# Altium PCB full_receive.PcbDoc
Units mil, origin at the board's own origin, x right, y up, seen from the top; angles counter-clockwise.
Board outline 20595 x 12245 mil, 2 copper layers (Top Layer, Bottom Layer); 110 components, 71 nets, 375 pads, 368 vias.
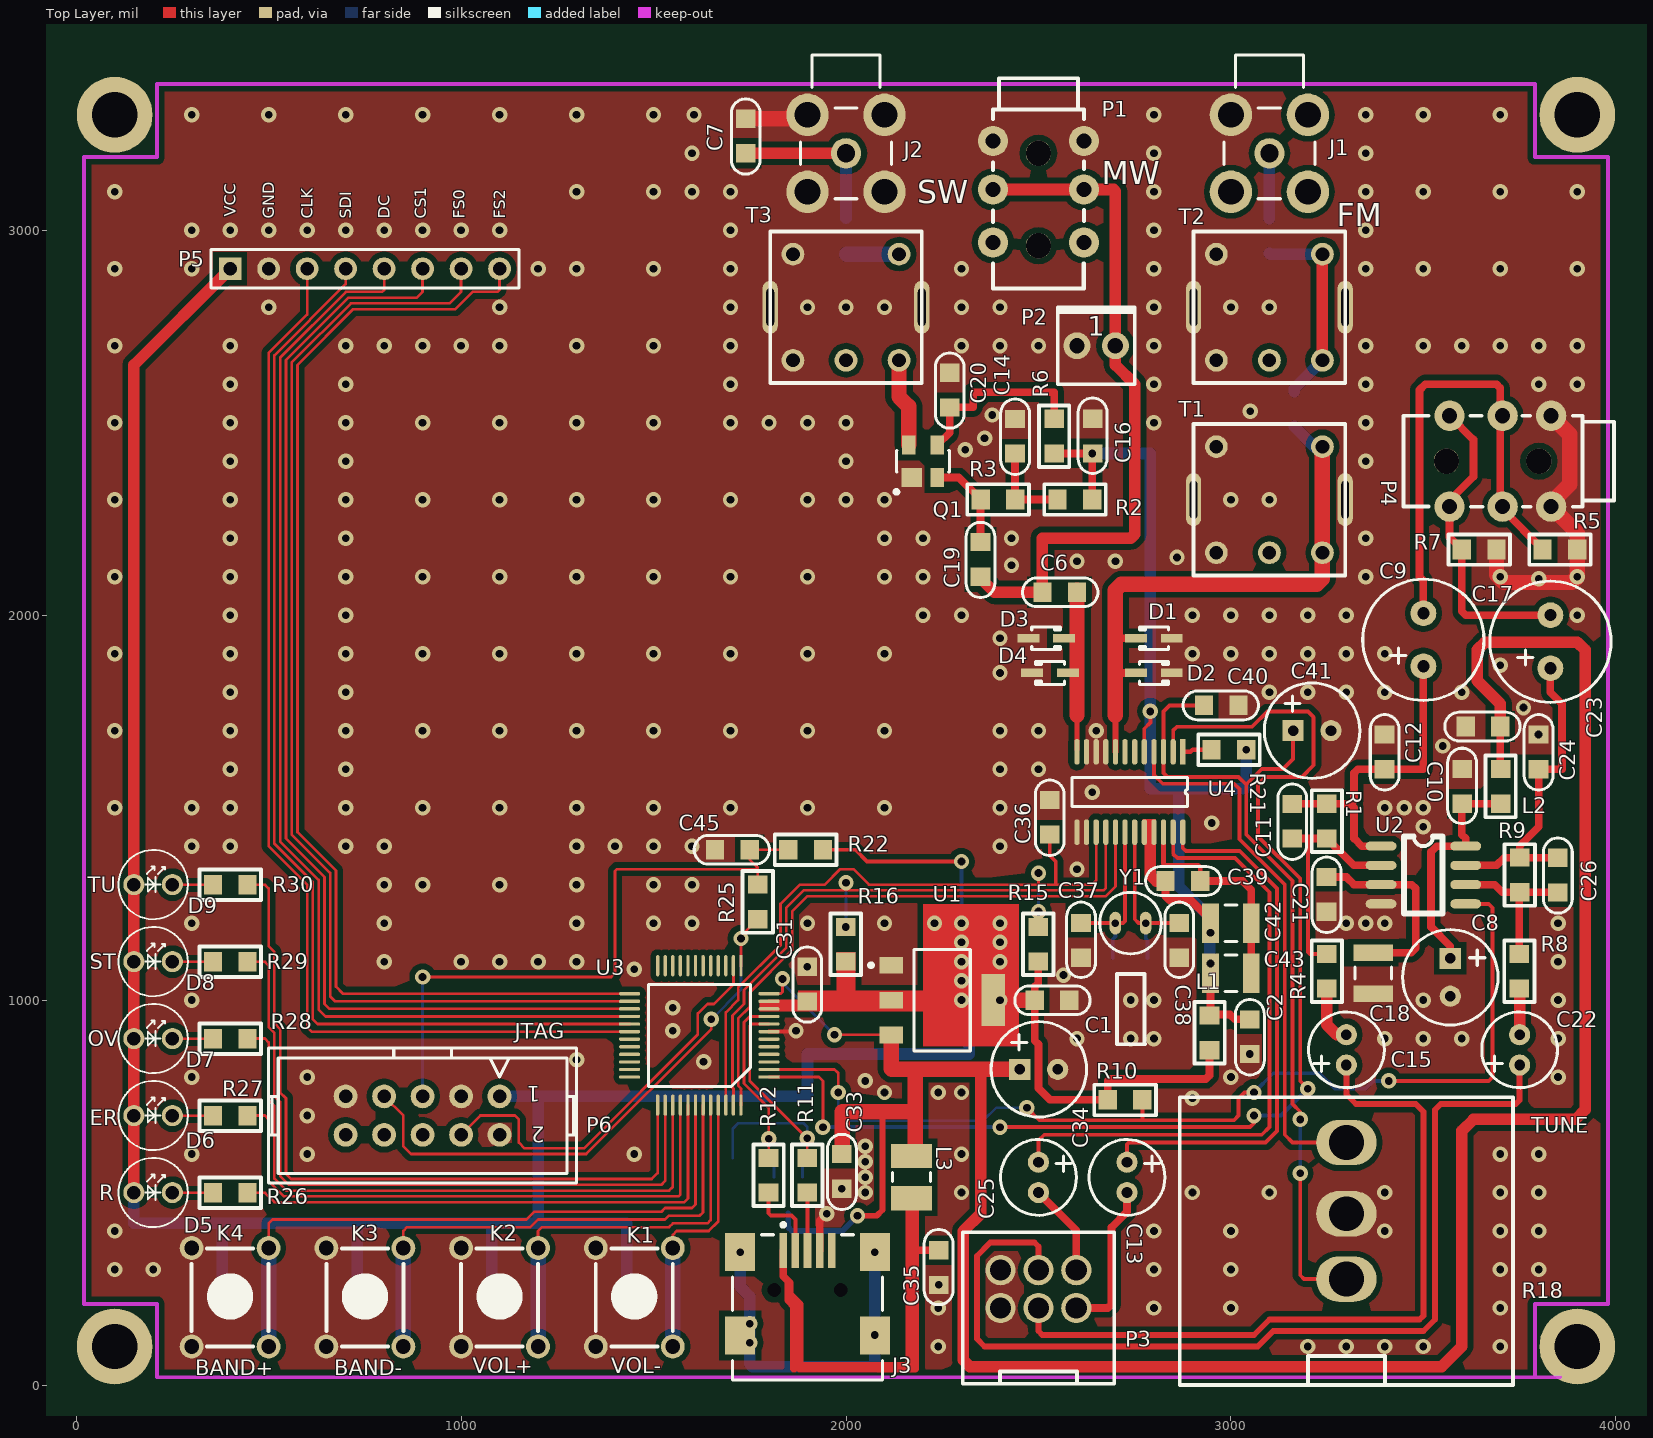
[diagram p0: Top Layer view]
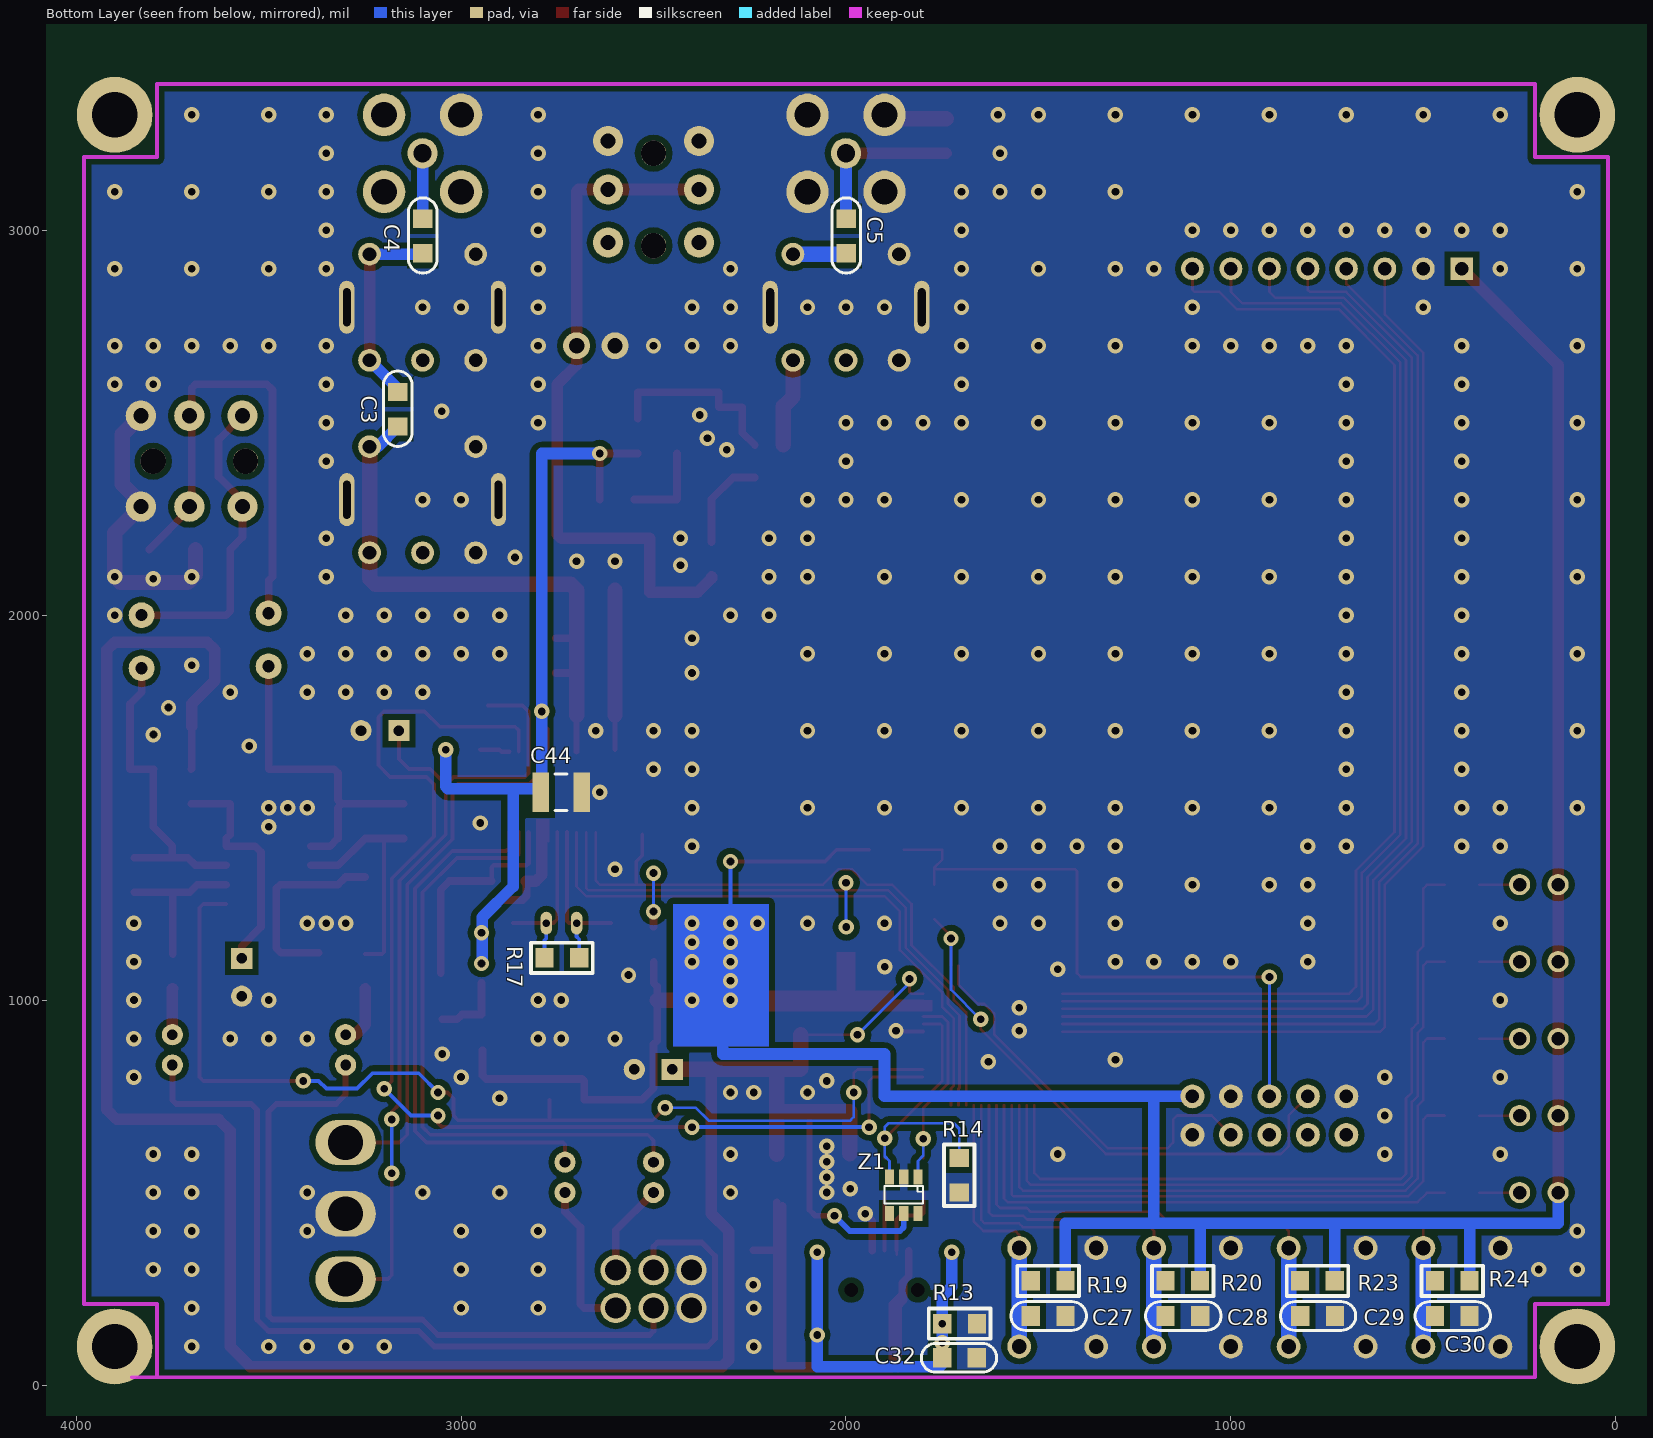
[diagram p1: Bottom Layer view, seen from below]

## Layer stack, top to bottom
Top Layer: signal copper 1.4
Dielectric: dielectric 12.6, FR-4, Dk 4.8
Bottom Layer: signal copper 1.4

## Board outline
-1470,8380 -1690,8160 -1690,-2660 18305,-2660 18800,-2165 18005,-1370 18005,9585 -585,9585 -1690,8480 -1795,8375 -1795,7905

## Design rules (kind name [scope] priority, off if disabled: settings)
Clearance Clearance_1 [(InPolygon)] p1: gap=15
Clearance [All] p2: gap=8
ComponentClearance [All] p1: gap=1 collisioncheckmode=2 verticalgap=10
Height [All] p1: minheight=0 maxheight=10000 prefheight=1000
HoleSize [All] p1: absolutevalues=TRUE maxlimit=1000 minlimit=1 maxpercent=80.000 minpercent=20.000
PlaneConnect [All] p1: planeconnectstyle=Direct reliefexpansion=20 reliefentries=4 reliefconductorwidth=10 reliefairgap=10
PolygonConnect [All] p1: connectstyle=Direct reliefconductorwidth=10 reliefentries=4 polygonreliefangle="90 Angle"
RoutingVias [All] p1: holewidth=28 width=50 viastyle="Through Hole" minholewidth=20 minwidth=40 maxholewidth=28 maxwidth=50
SolderMaskExpansion [All] p1: expansion=4
TestPointUsage [All] p1: valid=0 allowmultiple=FALSE
Testpoint [All] p1: side=15 testpointundercomponent=TRUE minsize=40 maxsize=100 preferedsize=60 minholesize=0 maxholesize=40 preferedholesize=32 testpointgrid=1 style=1023 order=0-112345678
Width [All] p1: maxlimit=100 minlimit=7 preferedwidth=10 minimp=50.000000 maximp=50.000000 favimp=50.000000
15 further rules are at their usual default settings.

## Components (designator, comment, footprint, x,y, rotation, side; value= is the part's Value field where it differs from the comment)
C1 "2.2uF" 0805C 2580,1000 r90 top
C2 "2.2uF" 0805C 3050,860 r0 top
C3 "33pF" 0805C 3165,2580 r0 bottom
C4 "33pF" 0805C 3100,3030 r0 bottom
C5 "33pF" 0805C 2000,3030 r0 bottom
C6 "0.47uF" 0805C 2600,2060 r90 top
C7 "33pF" 0805C 1740,3200 r0 top
C8 "10uF_25V" RB2.5-6.3 3570,1010 r90 top
C9 "2.2uF" 0805C 3610,1710 r270 top
C10 "0.33uF" 0805C 3600,1600 r180 top
C11 "2.2uF" 0805C 3160,1419.86 r0 top
C12 "100pF" 0805C 3400,1600 r0 top
C13 "10uF_25V" RB2-5 2730,500 r90 top
C14 "33pF" 0805C 2440,2420 r0 top
C15 "10uF_25V" RB2-5 3300,910 r270 top
C16 "0.47uF" 0805C 2640,2510 r180 top
C17 "1000uF_25V" RB3.5-8 3500,2005 r270 top
C18 "0.1uF" CAPC3225L 3370,1070 r90 top
C19 "0.47uF" 0805C 2350,2100 r0 top
C20 "0.47uF" 0805C 2270,2540 r0 top
C21 "0.1uF" 0805C 3249.27,1229.86 r0 top
C22 "10uF_25V" RB2-5 3750,910 r270 top
C23 "1000uF_25V" RB3.5-8 3830,2000 r270 top
C24 "100pF" 0805C 3800,1600 r0 top
C25 "10uF_25V" RB2-5 2500,500 r90 top
C26 "2.2uF" 0805C 3850,1280 r0 top
C27 "0.33uF" 0805C 1430,180 r90 bottom
C28 "0.33uF" 0805C 1080,180 r90 bottom
C29 "0.33uF" 0805C 730,180 r90 bottom
C30 "0.33uF" 0805C 380,180 r90 bottom
C31 "0.33uF" 0805C 1900,996.85 r0 top
C32 "0.1uF" 0805C 1750,70 r270 bottom
C33 "0.33uF" 0805C 1990,510 r0 top
C34 "10uF_25V" RB2.5-6.3 2550,820 r180 top
C35 "0.1uF" 0805C 2240,350 r180 top
C36 "0.1uF" 0805C 2530,1430 r0 top
C37 "20pF" 0805C 2610,1200 r180 top
C38 "20pF" 0805C 2865,1200 r180 top
C39 "0.1uF" 0805C 2920,1310 r90 top
C40 "0.1uF" 0805C 2930,1765 r270 top
C41 "10uF_25V" RB2.5-6.3 3260,1700 r180 top
C42 "2.2uF" CAPC3225L 3000,1200 r180 top
C43 "2.2uF" CAPC3225L 3000,1070 r180 top
C44 "2.2uF" CAPC3225L 2740,1540 r0 bottom
C45 "0.33uF" 0805C 1660,1390 r270 top
D1 "D1213A" SOD-323 2800,1940 r180 top
D2 "D1213A" SOD-323 2800,1850 r0 top
D3 "D1213A" SOD-323 2520,1940 r0 top
D4 "D1213A" SOD-323 2530,1850 r180 top
D5 "LED0" LEDLight 200,500 r0 top
D6 "LED0" LEDLight 200,700 r0 top
D7 "LED0" LEDLight 200,900 r0 top
D8 "LED0" LEDLight 200,1100 r0 top
D9 "LED0" LEDLight 200,1300 r0 top
J1 "COAX-F" MCX5.08-H5 3100,3200 r270 top
J2 "COAX-F" MCX5.08-H5 2000,3200 r270 top
J3 "440479-1" 440479 1900,40 r270 top
K1 "KEY_M" KEY_M 1350,100 r90 top
K2 "KEY_M" KEY_M 1000,100 r90 top
K3 "KEY_M" KEY_M 650,100 r90 top
K4 "KEY_M" KEY_M 300,100 r90 top
L1 "120nH" 0805R 2945,870 r0 top
L2 "120nH" 0805R 3700,1600 r180 top
L3 "120nH" 3225[1210] 2170,540 r90 top
P1 "PHONE_M" PHONE_ST 2500,3100 r90 top
P2 "Header 2" 2510-2 2600,2700 r0 top
P3 "Header 6" RK097 2500,200 r0 top
P4 "PHONE_M" PHONE_ST 3700,2400 r0 top
P5 "Header 8" HDR1X8 400,2900 r0 top
P6 "Header 5X2" FKV10SN 900,700 r180 top
Q1 "BF998" SOT143 2200,2400 r0 top
R1 "100K" 0805R 3250,1420 r0 top
R2 "10R" 0805R 2550,2300 r270 top
R3 "1K" 0805R 2350,2300 r270 top
R4 "12L" 0805R 3250,1030 r0 top
R5 "100K" 0805R 3810,2170 r270 top
R6 "12L" 0805R 2540,2510 r180 top
R7 "100K" 0805R 3600,2170 r270 top
R8 "12K" 0805R 3750,1030 r0 top
R9 "100K" 0805R 3750,1370 r180 top
R10 "10K" 0805R 2680,740 r270 top
R11 "2.2R" 0805R 1900,500 r0 top
R12 "2.2R" 0805R 1799.27,499.86 r0 top
R13 "1M" 0805R 1660,160 r90 bottom
R14 "1.5K" 0805R 1705,500 r180 bottom
R15 "20K" 0805R 2500,1100 r0 top
R16 "20K" 0805R 2000,1100 r0 top
R17 "4.6M" 0805R 2783,1109 r270 bottom
R18 "100K" 3590S 3300,275 r90 top
R19 "10K" 0805R 1520,270 r270 bottom
R20 "10K" 0805R 1170,270 r270 bottom
R21 "12K" 0805R 2950,1650 r270 top
R22 "1K" 0805R 1850,1390 r270 top
R23 "10K" 0805R 820,270 r270 bottom
R24 "10K" 0805R 470,270 r270 bottom
R25 "1K" 0805R 1770,1300 r180 top
R26 "1K" 0805R 445,500 r90 top
R27 "1K" 0805R 445,700 r90 top
R28 "1K" 0805R 445,900 r90 top
R29 "1K" 0805R 445,1100 r90 top
R30 "1K" 0805R 445,1300 r90 top
T1 "IF-001" IF_10X10 3100,2300 r270 top
T2 "IF-001" IF_10X10 3100,2800 r270 top
T3 "IF-001" IF_10X10 2000,2800 r270 top
U1 "REG1117-3.3" ZZ311 2250,1000 r270 top
U2 "LM4881M/NOPB" SO-8 3390,1400 r0 top
U3 "C8051F340/1/4/5" TQFP-48 1800,800 r180 top
U4 "Si4844-B20-GU" SSOP24-0.635 2875,1645 r270 top
Y1 "32.768K" Crystal32 2740,1200 r0 top
Z1 "NUP4301MR6T1" TSOP-6 1850,540 r270 bottom

## Footprints (in the part's own frame and the unit in brackets; to place one, negate y for a bottom-side part, rotate by r counter-clockwise, add the part's x,y. Pads: shape width x height; smd on the part's side, far side on the other; paste and mask are expansions set on the pad)
0805C [mm]
  rect 1.3x1.2 smd: 1(-0.019,-0.004) 2(-0.019,2.282)
  silkscreen extent -0.97,-1.38 0.93,3.59
0805R [mm]
  rect 1.3x1.2 smd: 1(-0.019,-0.004) 2(-0.019,2.282)
  silkscreen extent -1.02,-0.89 0.99,3.17
2510-2 [mil]
  round 70 hole 40: 1(0,0) 2(100,0)
  silkscreen extent -51,-100 150,100
3225[1210] [mm] "Chip Resistor; Body 3.2 x 2.5 mm (LxW typ)"
  rect 1.6x2.7 smd: 1(-1.4,0) 2(1.4,0)
  silkscreen extent -0.3,-1.25 0.3,1.25
3590S [mm]
  oval 3x4 hole 2.3: 1(0,0) 2(4.318,0) 3(9.017,0)
  silkscreen extent -6.99,-11 12,11
440479 [mm] "Connector; USB2.0, Type AB, SM; 5 Position; Right Angle"
  rect 2.3x0.5 smd: 1(-7.85,-1.6) 2(-7.85,-0.8) 3(-7.85,0) 4(-7.85,0.8) 5(-7.85,1.6)
  rect 2.5x2 smd: 6(-7.75,4.45) 7(-2.25,4.45) 8(-7.75,-4.45) 9(-2.25,-4.45)
  round 0.6 hole 0.9 unplated: MH1(-5.25,2.2) MH2(-5.25,-2.2)
  silkscreen extent -9.67,-4.95 0.7,4.95
CAPC3225L [mm] "Chip Capacitor, Body 3.2x2.5mm, IPC High Density"
  rect 1.1x2.6 smd: 1(-1.35,0) 2(1.35,0)
  silkscreen extent -0.4,-1.2 0.4,1.2, body extent -1.7,-1.35 1.7,1.35, height 1.35
Crystal32 [mm]
  oval 0.75x1.5 hole 0.5: 1(-1.02,0.001) 2(0.98,0.001)
  silkscreen extent -2.05,-8 2.01,2.03
FKV10SN [mil]
  round 62 hole 35: 1(-200,-50) 2(-200,50) 3(-100,-50) 4(-100,50) 5(0,-50) 6(0,50) 7(100,-50) 8(100,50) 9(200,-50) 10(200,50)
  silkscreen extent -400,-175 400,175
HDR1X8 [mm] "Connector; Header; 8 Position"
  rect 1.5x1.5 hole 0.9: 1(0,0)
  round 1.5 hole 0.9: 2(2.54,0) 3(5.08,0) 4(7.62,0) 5(10.16,0) 6(12.7,0) 7(15.24,0) 8(17.78,0)
  silkscreen extent -1.27,-1.27 19.05,1.27
IF_10X10 [mm]
  round 1.5 hole 0.9: 1(-3.5,3.5) 2(-3.5,-3.5) 3(3.5,-3.5) 4(3.5,0) 5(3.5,3.5)
  oval 3.5x1 hole 0.5 slot 2.5 at 0 deg: 6(0,5) 7(0,-5)
  silkscreen extent -5,-5 5,5
KEY_M [mil]
  round 62 hole 38: 1(0,0) 1(255.91,0) 2(0,-200) 2(255.91,-200)
  silkscreen extent 0,-200 255,0
LEDLight [mil]
  round 55 hole 35: 1(-50,0) 2(50,0)
  silkscreen extent -90,-90 90,90
MCX5.08-H5 [mm] "Connector; RF Coaxial, MCX, Thru-Hole; 5 Position; Right-Angle"
  round 2 hole 1.2: 1(0,0)
  round 2.8 hole 1.7: 2(-2.54,-2.54) 3(2.54,-2.54) 4(2.54,2.54) 5(-2.54,2.54)
  silkscreen extent -6.5,-3 3,3
PHONE_ST [mm]
  round 1.676 hole 1.676: 0(-3.556,0) 0(2.54,0)
  round 2 hole 1: 1(-3.35,-3) 1(-3.35,3) 2(0.15,3) 2(0.15,-3) 3(3.35,-3) 3(3.35,3)
  silkscreen extent -6.39,-3.01 7.49,3
RB2-5 [mil]
  round 55 hole 27.56: 1(78.74,0) 2(0,0)
  silkscreen extent -59,-98 138,98
RB2.5-6.3 [mil]
  rect 55x55 hole 27.56: 1(98.43,0)
  round 55 hole 27.56: 2(0,0)
  silkscreen extent -75,-124 173,124
RB3.5-8 [mm]
  round 1.7 hole 0.8: 1(3.5,0) 2(0,0)
  silkscreen extent -2.25,-4 5.75,4
RK097 [mm]
  round 2 hole 1.4: 1(-2.5,0) 2(0,0) 3(2.5,0) 4(2.5,2.5) 5(0,2.5) 6(-2.5,2.5)
  silkscreen extent -5,-5 5,5
SO-8 [mil]
  oval 80x24 smd: 1(0,0) 2(0,-50) 3(0,-100) 4(0,-150) 5(220,-150) 6(220,-100) 7(220,-50) 8(220,0)
  silkscreen extent 60,-175 160,25
SOD-323 [mm] "SOD-323/SC-76; 2 Leads; Body 1.7 x 1.3 mm, (LxW)"
  rect 1.45x0.55 smd: 1(1.175,0) 2(-1.175,0)
  silkscreen extent -0.95,-0.75 0.95,0.75
SOT143 [mm] "SOT-143; 4 Leads; Body 3 x 2.5 mm, inc. leads (LxW max)"
  rect 1.35x1.25 smd: 1(-0.75,-1.075)
  rect 0.9x1.25 smd: 2(0.95,-1.075) 3(0.95,1.075) 4(-0.95,1.075)
  silkscreen extent -1.87,-2.15 1.75,0.7
SSOP24-0.635 [mm]
  rect 1.7x0.35 smd: 1(0,0)
  oval 1.7x0.35 smd: 2(0,-0.635) 3(0,-1.27) 4(0,-1.905) 5(0,-2.54) 6(0,-3.175) 7(0,-3.81) 8(0,-4.445) 9(0,-5.08) 10(0,-5.715) 11(0,-6.35) 12(0,-6.985) 13(5.3,-6.985) 14(5.3,-6.35) 15(5.3,-5.715) 16(5.3,-5.08) 17(5.3,-4.445) 18(5.3,-3.81) 19(5.3,-3.175) 20(5.3,-2.54) 21(5.3,-1.905) 22(5.3,-1.27) 23(5.3,-0.635) 24(5.3,0)
  silkscreen extent 1.68,-7.3 3.62,0.32
TQFP-48 [mm]
  rect 1.4x0.22 smd: 1(0,0)
  oval 1.4x0.22 smd: 2(0,-0.5) 3(0,-1) 4(0,-1.5) 5(0,-2) 6(0,-2.5) 7(0,-3) 8(0,-3.5) 9(0,-4) 10(0,-4.5) 11(0,-5) 12(0,-5.5) 25(9.2,-5.5) 26(9.2,-5) 27(9.2,-4.5) 28(9.2,-4) 29(9.2,-3.5) 30(9.2,-3) 31(9.2,-2.5) 32(9.2,-2) 33(9.2,-1.5) 34(9.2,-1) 35(9.2,-0.5) 36(9.2,0)
  oval 0.22x1.4 smd: 13(1.85,-7.35) 14(2.35,-7.35) 15(2.85,-7.35) 16(3.35,-7.35) 17(3.85,-7.35) 18(4.35,-7.35) 19(4.85,-7.35) 20(5.35,-7.35) 21(5.85,-7.35) 22(6.35,-7.35) 23(6.85,-7.35) 24(7.35,-7.35) 37(7.35,1.85) 38(6.85,1.85) 39(6.35,1.85) 40(5.85,1.85) 41(5.35,1.85) 42(4.85,1.85) 43(4.35,1.85) 44(3.85,1.85) 45(3.35,1.85) 46(2.85,1.85) 47(2.35,1.85) 48(1.85,1.85)
  silkscreen extent 1.23,-6.11 7.96,0.62
TSOP-6 [mil]
  rect 39x24 smd: 1(0,37) 2(0,0) 3(0,-37) 4(94,-37) 5(94,0) 6(94,37)
  silkscreen extent 23,-50 69,50
ZZ311 [mm] "SOT-223/SC-73; 4 Leads; Body 6.7 x 7.3 mm, inc. leads (LxW max)"
  rect 1.1x1.55 smd: 1(-2.3,-3.375) 2(0,-3.375) 3(2.3,-3.375)
  rect 3.45x1.55 smd: 4(0,3.375)
  silkscreen extent -3.35,-4.82 3.35,1.85

## Part data
C1 C2 C3 C4 C5 C6 C7 C9 C10 C11 C12 C14 C16 C18 C19 C20 C21 C24 C26 C27 C28 C29 C30 C31 C32 C33 C35 C36 C37 C38 C39 C40 C42 C43 C44 C45: library part Cap, "Capacitor"
C8 C13 C15 C17 C22 C23 C25 C34 C41: library part "Cap Pol2", "Polarized Capacitor (Axial)"
D1 D2 D3 D4: library part DIODE1
D5 D6 D7 D8 D9: "Typical INFRARED GaAs LED"
J1 J2: "RF Coaxial PCB Connector, MCX; Thru-Hole, Right-Angle Mount Socket, Blunt Post Terminal, 50 Ohm Impedance"
J3: "USB 2.0, Right Angle, SMT, AB Type, Receptacle, 5 Position, Black"
L1 L2 L3: library part Inductor, "Inductor"
P2: "Header, 2-Pin"
P3: "Header, 6-Pin"
P5: "Header, 8-Pin"
P6: "Header, 5-Pin, Dual row"
Q1: "Silicon N-channel Dual-gate MOSFET"
R1 R2 R3 R4 R5 R6 R7 R8 R9 R10 R11 R12 R13 R14 R15 R16 R17 R19 R20 R21 R22 R23 R24 R25 R26 R27 R28 R29 R30: library part Res2, "Resistor"
R18: library part RPot, "Potentiometer"
U1: "800mA and 1A Low Dropout Positive Regulator 2.85V, 3.3V, 5V, and Adjustable"
U4: "模拟调谐数字显示 AM/FM/SW 收音机"
Y1: library part XTAL, "Crystal Oscillator"
Z1: "ESD protection"

## Free pads (board coordinates)
  round 196.85 hole 118.11: 9(100,100) 9(100,3300) 9(3900,100) 9(3900,3300)

## Via types
v1: diameter 40, hole 20, Top Layer to Bottom Layer, 368 vias

## Nets (pads, with @x,y where several pads share a name; then routed paths per layer and width w, separated by ;. In a path a pad name is that pad's centre, name@x,y a point inside that pad or via, vN(x,y) a via of type N, cw(c..) or ccw(c..) an arc to the next point about the centre after c; other vN are vias at no path point)
AMI: C6.1 D3.1 D4.2 U4.12 | length 414.9
  Top Layer w12: U4.12@2600,1650 2600,1740.14
  Top Layer w40: 2600.14,1740.14 C6.1@2600.14,2064.86
AST: R10.2 U2.5 U3.2 | length 2701.4
  Top Layer w7: U3.2 1970.32,819.68 1980,810 v1(1980,760)
  Top Layer w10: v1(2470,720) 2502,688 3008,688 3020,700 3020,745 3035,760 v1(3060,760) ; 2769.86,688.14 R10.2 ; v1(3410,790) 3670,790 3680,800 3680,1240 3670,1250 U2.5
  Bottom Layer w7: v1(1980,760) 1980,696.5 1990,686.5 2356.5,686.5 2390,720 v1(2470,720)
  Bottom Layer w10: v1(3060,760) 3110,810 3230,810 3270,770 3350,770 3370,790 v1(3410,790)
C2CK: P6.7 R25.2 U3.13 | length 1499.4
  Top Layer w7: P6.7 850,700 850,620 870,600 1325,600 1650,925 v1(1650,950) ; U3.13 1727.16,1166.57 R25.2
  Bottom Layer w7: v1(1650,950) 1727.16,1027.16 v1(1727.16,1160)
C2D: P6.4 U3.14 | length 1055.1
  Top Layer w7: P6.4 1050,700 1140,700 1150,690 1150,630 1165,615 1318.79,615 1615,911.21 1615,965 1640,990 1656.79,990 1707.48,1040.69 U3.14
FMI: C3.2 D1.1 D2.2 T1.1 T1.5 U4.8 | length 1515.7
  Top Layer w15: U4.8 2700,1740
  Top Layer w20: 2700,1850 D2.2 ; 2700,1940 D1.1
  Top Layer w40: 2700,1740 2700,2065 2715,2080 3222.8,2080 3237.8,2095 T1.1
  Bottom Layer w30: C3.2 3216.61,2437.8 T1.1
KEY1: C27.2 K1.2 R19.1 U3.45 | length 724.8
  Top Layer w7: K1.2@1550,355.91 1550,390 1560,400 1643.11,400 1668.11,425 U3.45
  Bottom Layer w40: K1.2@1550,100 K1.2@1550,355.91
KEY2: C28.2 K2.2 R20.1 U3.44 | length 1058.9
  Top Layer w7: K2.2@1200,355.91 1200,400 1210,410 1540,410 1550,420 1640,420 1648.43,428.43 U3.44
  Bottom Layer w40: K2.2@1200,100 K2.2@1200,355.91
KEY3: C29.2 K3.2 R23.1 U3.43 | length 1377.4
  Top Layer w7: K3.2@850,355.91 850,400 860,410 1180,410 1200,430 1530,430 1540,440 1620,440 1628.74,448.74 U3.43
  Bottom Layer w40: K3.2@850,100 K3.2@850,355.91
KEY4: C30.2 K4.2 R24.1 U3.42 | length 1707.5
  Top Layer w7: K4.2@500,355.91 500,420 510,430 1170,430 1190,450 1520,450 1530,460 1600,460 1609.05,469.05 U3.42
  Bottom Layer w40: K4.2@500,100 K4.2@500,355.91
LANT: C6.2 C19.1 P1.2 P2.2 | length 1797.2
  Top Layer w30: C19.1 2349.27,2095.73 2385.73,2059.27 C6.2 2510.14,2200 2740,2200 2750,2210 2750,2600 2700,2650 2700,3101.81 2695.91,3105.91 P1.2@2381.89,3105.91
LCD_CLK: P5.3 U3.30 | length 2895.6
  Top Layer w7: P5.3 600,2781.21 500,2681.21 500,1400 600,1300 600,930 611.89,918.11 U3.30
LCD_CS1: P5.6 U3.27 | length 3000.6
  Top Layer w7: P5.6 900,2840 885,2825 707.43,2825 545,2662.57 545,1420 645,1320 645,990 657.84,977.16 U3.27
LCD_DC: P5.5 U3.28 | length 2948.3
  Top Layer w7: P5.5 800,2845 795,2840 701.21,2840 530,2668.79 530,1412.43 630,1312.43 630,975 647.52,957.48 U3.28
LCD_FS0: P5.7 U3.26 | length 3047.1
  Top Layer w7: P5.7 1000,2840 970,2810 713.64,2810 560,2656.36 560,1430 660,1330 660,1010 673.15,996.85 U3.26
LCD_FS2: P5.8 U3.25 | length 3087.7
  Top Layer w7: P5.8 1100,2845 1095,2840 1030,2840 985,2795 719.85,2795 575,2650.15 575,1436.21 675,1336.21 675,1035 693.47,1016.53 U3.25
LCD_SDI: P5.4 U3.29 | length 2895.9
  Top Layer w7: P5.4 700,2860 515,2675 515,1406.21 615,1306.21 615,950 627.2,937.8 U3.29
LED0: R30.1 U3.37 | length 1973
  Top Layer w7: R30.1 490.73,1299.27 500,1290 500,1140 515,1125 515,940 530,925 530,760 545,745 545,548.64 558.64,535 1495,535 1510.63,550.63 U3.37
LED1: R29.1 U3.38 | length 1829.4
  Top Layer w7: R29.1 490.73,1099.27 500,1090 500,930 515,915 515,750 530,735 530,542.43 552.43,520 1520,520 1530.32,530.32 U3.38
LED2: R28.1 U3.39 | length 1683.5
  Top Layer w7: R28.1 445.87,900 490,900 500,890 500,740 515,725 515,536.21 546.21,505 1540,505 1550,515 U3.39
LED3: R27.1 U3.40 | length 1540
  Top Layer w7: R27.1 445.87,700 490,700 500,690 500,530 540,490 1565,490 1569.68,494.68 U3.40
LED4: R26.1 U3.41 | length 1446
  Top Layer w7: R26.1 490.73,499.27 515,475 1565,475 ; 1520,475 1580,475 1589.37,484.37 U3.41
LNA_EN: R21.1 U4.1 | length 77.2
  Top Layer w12: U4.1 2895,1645 2900.73,1650.73 R21.1
MVCC: C1.2 C31.1 D5.1 D6.1 D7.1 D8.1 D9.1 L1.1 P5.1 P6.1 R10.1 R15.1 R16.1 R19.2 R20.2 R22.2 R23.2 R24.2 U1.2 U1.4 U3.10 U3.11 | length 8206.7
  Top Layer w10: U3.10 U3.11 U1.2@2113.98,996.85 ; R22.2 2024.27,1390.73 2055,1360 v1(2300,1360)
  Top Layer w20: R15.1 2499.27,1044.27 2490.14,1035.14 2490.14,894.86 2500,885 2500,770.73 2530,740.73 R10.1 2680,740.87 2680,790 2685,795 2935,795 2944.27,804.27 L1.1
  Top Layer w30: D5.1 150,2650 P5.1
  Top Layer w40: U1.4@2383.61,999.27 C1.2
  Bottom Layer w10: v1@2300,1115 v1(2300,1360)
  Bottom Layer w30: 150,420 D5.1 ; 150.14,419.86 1430.14,419.86 ; R24.2@380,280 380,419.86 ; R23.2 730.14,419.86 ; 1075.14,419.86 1080,415 R20.2@1080,280 ; P6.1 1900,750 1900,860 2320,860 2320,1000 ; 1200,419.86 1200,750 ; R19.2@1430,280 1430,419.72
  other v1: 2400,999.27 2300,1000 2300,1050 2300,1100 2400,1100 2300,1150 2400,1150 2230,1200 2300,1200 2400,1200
NetC3_1: C3.1 C4.2 T2.1 T2.5 | length 527.6
  Top Layer w30: T2.5 T2.1
  Bottom Layer w30: C4.2 3101.61,2937.8 T2.1 ; C3.1 3164.27,2588.68 T2.5
NetC4_1: C4.1 J1.1 | length 169.1
  Bottom Layer w30: C4.1 J1.1@3099.27,3199.27
NetC5_1: C5.1 C7.1 J2.1 | length 429.7
  Top Layer w30: C7.1@1739.4,3200 J2.1
  Bottom Layer w30: C5.1@2000,3030.87 J2.1
NetC5_2: C5.2 T3.1 | length 136.2
  Bottom Layer w40: C5.2@2001.61,2937.8 T3.1
NetC8_1: C8.1 C10.2 L2.2 U2.8 | length 608.1
  Top Layer w20: C8.1 3570,1140 3520,1190 3520,1385 3535,1400 U2.8 3610,1420 3600,1430 3600,1509.4 C10.2 L2.2
NetC11_1: C11.1 R1.1 R4.2 U2.2 | length 615.9
  Top Layer w10: 3200,1419.86 3200,1125 3205.14,1119.86 R4.2
  Top Layer w20: C11.1@3149.27,1419.86 R1.1 3319.13,1350 U2.2
NetC11_2: C11.2 C12.1 C17.1 R1.2 U2.1 | length 868.7
  Top Layer w20: C11.2@3149.27,1509.86 3310.14,1509.86 ; U2.1 3340,1400 3320,1420 3320,1500 3310.14,1509.86 ; C17.1 3500,1600 3499.86,1599.86 3329.86,1599.86 3320,1590 3320,1519.72 3310.14,1509.86
NetC13_2: C13.2 P3.3 | length 402.3
  Top Layer w20: P3.3 2680,200 2690,210 2690,410 2730,450 C13.2
NetC14_1: C14.1 R2.1 R3.2 | length 229.4
  Top Layer w20: C14.1 2439.27,2301.33 R3.2 R2.1
NetC15_1: C15.1 P3.2 | length 1909.8
  Top Layer w15: P3.2 2500,140 2510,130 3060,130 3100,170 3490,170 3500,180 3500,710 3480,730 3325,730 3300,755 C15.1
NetC15_2: C15.2 R4.1 | length 155.5
  Top Layer w30: R4.1 3249.27,935.73 3275,910 C15.2
NetC17_2: C17.2 P4.2 R5.1 | length 1278
  Top Layer w20: C17.2@3485,2000 C17.2@3490,2005 ; C17.2 3500,2090 3490,2100 3490,2585 3505,2600 3690,2600 3700,2590 3700,2285 3703.11,2281.89 3705.91,2281.89 3705.91,2274.69 R5.1
NetC18_2: C18.2 C21.2 U2.3 | length 513
  Top Layer w20: C21.2@3249.27,1319.86 3300.14,1319.86 3320,1300 3470,1300 3480,1290 3480,1135 3468.15,1123.15 C18.2
NetC19_2: C19.2 Q1.2 R3.1 | length 247.2
  Top Layer w20: Q1.2 2292.92,2357.68 R3.1 2349.27,2300.14 C19.2
NetC20_1: C20.1 Q1.3 R6.1 | length 490.2
  Top Layer w20: Q1.3 2269.27,2474.19 C20.1 2329.86,2539.86 2330.73,2540.73 2330.73,2579.27 2540.73,2579.27 R6.1
NetC22_1: C22.1 P3.5 | length 2549.1
  Top Layer w15: P3.5 2500,360 2490,370 2375,370 2340,335 2340,120 2360,100 3070,100 3110,140 3500,140 3530,170 3530,715 3545,730 3740,730 3750,740 C22.1
NetC22_2: C22.2 R8.1 | length 120.2
  Top Layer w30: R8.1 3750,1029.13 C22.2
NetC23_1: C23.1 C24.1 C26.2 R9.1 U2.7 | length 833.2
  Top Layer w20: U2.7 3690,1350 3710.14,1370.14 C26.2@3848.99,1370.14 ; R9.1 3750.73,1400.73 3800,1450 3800,1599.13 C24.1 3859.86,1599.86 3860,1600 3860,1770 3830,1800 C23.1
NetC23_2: C23.2 P4.1 R7.1 | length 790.5
  Top Layer w20: P4.1@3568.11,2281.89 3568.11,2202.49 R7.1 3599.86,2010.14 3610,2000 C23.2 ; P4.1@3568.11,2298.11 3630,2360 3630,2456.22 P4.1@3568.11,2518.11
NetC25_2: C25.2 P3.4 | length 242.3
  Top Layer w20: C25.2 2598.43,401.57 P3.4
NetC26_1: C26.1 R8.2 R9.2 U2.6 | length 408.1
  Top Layer w20: U2.6 3685,1300 3704.86,1280.14 C26.1@3848.99,1280.14 ; R8.2 3749.27,1278.67 R9.2
NetC32_1: C32.1 J3.6 J3.7 J3.8 J3.9 R13.2 | length 964.1
  Bottom Layer w30: v1(1725,345) 1725,255 1749.86,230.14 v1(1749.86,159.27) ; C32.1 R13.2@1750.14,158.99 ; v1(1750.14,110) 1750.14,54.86 1757,48 2075,48 v1(2075,130) v1(2075,345)
NetC45_2: C45.2 P6.5 R22.1 R25.1 | length 1653
  Top Layer w7: v1(900,1060) 1390,1060 1400,1070 1400,1335 1405.14,1340.14 1766.61,1340.14 1770.73,1344.27 ; R25.1 1770.73,1344.27 ; R22.1 C45.2 1749.86,1365.14 1770.73,1344.27
  Bottom Layer w7: P6.5 v1(900,1060)
NetD5_2: D5.2 R26.2 | length 104.4
  Top Layer w7: D5.2@250.73,499.27 R26.2
NetD6_2: D6.2 R27.2 | length 104.4
  Top Layer w7: D6.2@250.73,699.27 R27.2
NetD7_2: D7.2 R28.2 | length 104.4
  Top Layer w7: D7.2@250.73,899.27 R28.2
NetD8_2: D8.2 R29.2 | length 104.4
  Top Layer w7: D8.2@250.73,1099.27 R29.2
NetD9_2: D9.2 R30.2 | length 104.4
  Top Layer w7: D9.2@250.73,1299.27 R30.2
NetJ3_2: J3.2 R12.1 | length 431.8
  Top Layer w7: R12.1@1799.27,499.86 1799.27,445.73 1805,440 1858.5,440 1868.5,430 J3.2@1868.5,339.06
  Top Layer w10: R12.1 1798.53,446.47 1799.27,445.73 1805,440 1858.5,440 1868.5,430 J3.2
NetJ3_3: J3.3 R11.1 | length 151.1
  Top Layer w10: R11.1 1900,499.13 J3.3
NetQ1_4: Q1.4 T3.5 | length 230.2
  Top Layer w40: T3.5 2137.8,2567.2 2162.6,2542.4 Q1.4
RFGND: C1.1 C2.1 C7.2 C8.2 C9.1 C10.1 C12.2 C14.2 C16.1 C18.1 C20.2 C21.1 C24.2 C27.1 C28.1 C29.1 C30.1 C31.2 C32.2 C33.1 C34.2 C35.2 C36.2 C37.2 C38.2 C40.2 C41.2 C44.1 C45.1 D1.2 D2.1 D3.2 D4.1 J1.2 J2.2 J2.3 J2.4 J2.5 J3.4 K1.1 K2.1 K3.1 K4.1 P1.3 P2.1 P3.1 P3.6 P4.3 P5.2 P6.2 P6.3 P6.9 Q1.1 R5.2 R7.2 R13.1 R14.1 R18.2 T1.2 T1.3 T1.6 T1.7 T2.2 T2.3 T2.6 T2.7 T3.2 T3.3 T3.6 T3.7 U1.1 U2.4 U3.7 U4.9 U4.10 U4.11 U4.13 U4.14 Z1.2 | length 1113
  Top Layer w10: U3.7 v1@1868.11,918.11
  Top Layer w20: J3.4 1931.49,426.49 v1(1950,445)
  Top Layer w40: C7.2 1849.86,3289.86 1860,3300 J2.2 ; R7.2 3689.86,2105.14 3710,2085 3885,2085 v1(3899.86,2099.86) 3899.86,2213.92 3831.89,2281.89 3831.89,2291.89 3880,2340 3880,2470 P4.3@3831.89,2518.11
  other v1: 2240,100 3200,100 3300,100 3400,100 3500,100 3700,100 2240,200 2800,200 3000,200 3700,200 2240.73,260.14 100,300 200,300 2800,300 3000,300 3700,300 3800,300 100,400 2800,400 3000,400 3400,400 3700,400 3800,400 2050,500 2300,500 2900,500 3100,500 3400,500 3700,500 3800,500 1989.27,509.86 2050,540 2050,580 300,600 600,600 1450,600 2300,600 3700,600 3800,600 2050,620 600,700 2900,745 2100,760 2240,760 2300,760 2050,790 300,800 600,800 3000,800 3850,800 1630,840 1300,845 3049.27,859.86 2600,900 2740,900 2800,900 3400,900 3500,900 3600,900 3850,900 1550,920 1870,920 1550,980 300,1000 2740,1000 2800,1000 3500,1000 3850,1000 2565,1065 1450,1080 1899.27,1086.71 800,1100 1000,1100 1100,1100 1200,1100 1300,1100 3850,1100 300,1200 800,1200 1300,1200 1500,1200 1600,1200 1900,1200 2100,1200 3300,1200 3350,1200 3400,1200 3850,1200 800,1300 900,1300 1100,1300 1300,1300 1500,1300 1600,1300 2600,1340 300,1400 400,1400 700,1400 800,1400 1300,1400 1400,1400 1500,1400 1600,1400 2400,1400 3500,1450 2950,1460 100,1500 300,1500 400,1500 700,1500 900,1500 1100,1500 1300,1500 1500,1500 1700,1500 1900,1500 2100,1500 2400,1500 3400,1500 3450,1500 3500,1500 2640,1540 400,1600 700,1600 2400,1600 2500,1600 3550,1660 3799.27,1689.86 100,1700 400,1700 700,1700 900,1700 1100,1700 1300,1700 1500,1700 1700,1700 1900,1700 2100,1700 2400,1700 2500,1700 2650,1700 3760,1760 400,1800 700,1800 3100,1800 3200,1800 3300,1800 3400,1800 3600,1800 2400,1850 3700,1870 100,1900 400,1900 700,1900 900,1900 1100,1900 1300,1900 1500,1900 1700,1900 1900,1900 2100,1900 2900,1900 3000,1900 3100,1900 3200,1900 3300,1900 3400,1900 2400,1940 400,2000 700,2000 2200,2000 2300,2000 2900,2000 3000,2000 3100,2000 3200,2000 3300,2000 3900,2000 3800,2095 100,2100 400,2100 700,2100 900,2100 1100,2100 1300,2100 1500,2100 1700,2100 1900,2100 2100,2100 2200,2100 3350,2100 3700,2100 2430,2130 2600,2140 2700,2140 2860,2150 400,2200 700,2200 2100,2200 2200,2200 2430,2200 3350,2200 100,2300 400,2300 700,2300 900,2300 1100,2300 1300,2300 1500,2300 1700,2300 1900,2300 2000,2300 2100,2300 3000,2300 3100,2300 400,2400 700,2400 2000,2400 3350,2400 2310,2430 2360,2460 100,2500 400,2500 700,2500 900,2500 1100,2500 1300,2500 1500,2500 1700,2500 1800,2500 1900,2500 2000,2500 2800,2500 3350,2500 2380,2520 3050,2530 400,2600 700,2600 1700,2600 2800,2600 3350,2600 3800,2600 3900,2600 100,2700 400,2700 700,2700 800,2700 900,2700 1000,2700 1100,2700 1300,2700 1500,2700 1700,2700 2300,2700 2400,2700 2500,2700 2800,2700 3350,2700 3500,2700 3600,2700 3700,2700 3800,2700 3900,2700 500,2800 1100,2800 1700,2800 1900,2800 2000,2800 2100,2800 2300,2800 2400,2800 2800,2800 3000,2800 3100,2800 100,2900 300,2900 1200,2900 1300,2900 1500,2900 1700,2900 2300,2900 2800,2900 3350,2900 3500,2900 3700,2900 3900,2900 300,3000 400,3000 500,3000 600,3000 700,3000 800,3000 900,3000 1000,3000 1100,3000 1700,3000 2800,3000 3350,3000 100,3100 1300,3100 1500,3100 1600,3100 1700,3100 2800,3100 3350,3100 3500,3100 3700,3100 3900,3100 1600,3200 2800,3200 3350,3200 300,3300 500,3300 700,3300 900,3300 1100,3300 1300,3300 1500,3300 1605,3300 2800,3300 3350,3300 3500,3300 3700,3300
RFVCC: C2.2 C16.2 C39.2 C42.2 C43.2 C44.2 L1.2 R2.2 R6.2 R21.2 U4.5 U4.20 U4.21 | length 2748.1
  Top Layer w10: U4.5 2775,1705 2790.73,1720.73 v1(2790.73,1750)
  Top Layer w20: R6.2 C16.2 2639.86,2419.27 R2.2 ; C39.2 2830.14,1269.86 2840,1260 2895,1260 C42.2@2937.5,1217.5 ; C43.2@2946.85,1045 2946.85,962.45 2997.55,962.45 3010.14,949.86 C2.2
  Top Layer w30: 2790,1455 2790,1325 2805.73,1309.27 C39.2
  Bottom Layer w10: 2790.73,1724.27 v1(2790.73,1750)
  Bottom Layer w30: v1(2640,2420) 2790,2420 2790.73,2419.27 2790.73,1549.27 3034.27,1549.27 3039.86,1554.86 v1(3039.86,1650.73) ; 2865,1549.27 2865,1295 2945,1215 v1@2945,1095
  other v1: 2946.85,1095 2946.85,1175
SI_DBYP: C39.1 C42.1 C43.1 U4.22 | length 575.5
  Top Layer w12: U4.22 2825,1355 2830,1350 2915.14,1350 2920.14,1345 C39.1
  Top Layer w20: C39.1 3030.73,1309.27 3053.15,1286.85 C43.1
SI_IRQ: U3.1 U4.2 | length 3158.8
  Top Layer w7: U3.1 1930,800 1940,790 v1(1940,670)
  Top Layer w10: v1(2400,670) 3050,670 3060,680 v1(3060,700) ; U4.2 2850,1700 2860,1710 3055,1710 3095,1750 3200,1750 3215,1735 3215,1610 3185,1580 3090,1580 3070,1560 3070,1425.46 3180,1315.46 3180,790 v1(3200,770)
  Bottom Layer w10: v1(1940,670) v1(2400,670) ; v1(3060,700) 3130,700 v1(3200,770)
SI_LOUT: C13.1 U4.24 | length 1410.6
  Top Layer w10: C13.1 2730,625 2735,630 3090,630 3120,660 3120,1290 3023,1387 2883,1387 2875,1395 U4.24
SI_NRST: C36.1 R15.2 U3.46 U4.15 | length 1890.4
  Top Layer w7: U3.46 1687.8,967.8 1720,1000 1720,1032.43 1830,1142.43 1830,1250 1880,1300 1945,1300 1985,1340 2020,1340 2060,1300 2640,1300 2650,1310 U4.15 ; 2500,1300 v1(2500,1330)
  Top Layer w10: C36.1 2529.27,1375.73 2545,1360 2545,1301.5
  Top Layer w20: R15.2@2500,1190.6 v1(2500,1230)
  Bottom Layer w7: v1(2500,1230) v1(2500,1330)
SI_ROUT: C25.1 U4.23 | length 1628.5
  Top Layer w10: C25.1 2500,635 2515,650 3080,650 3100,670 3100,1280 3011,1369 2861,1369 2850,1380 U4.23
SI_SCLK: U3.48 U4.17 | length 1572.1
  Top Layer w7: U3.48 1727.16,770.41 1720,777.57 1720,952.48 1750,982.48 1750,1020 1860,1130 1860,1230 1900,1270 2675,1270 2700,1295 U4.17
SI_SDIO: R16.2 U3.47 U4.16 | length 1683.3
  Top Layer w7: U3.47 1707.48,769.31 1705,771.79 1705,960 1735,990 1735,1026.21 1845,1136.21 1845,1240 1890,1285 2668.79,1285 2675,1291.21 U4.16
  Bottom Layer w7: v1@2000,1189.86 v1(2000,1305)
  other v1: 1999.27,1189.86
SI_XTALI: C38.1 R17.1 U4.19 Y1.2 | length 438.3
  Top Layer w10: U4.19 2750,1210 2759.95,1200.05 C38.1@2865.64,1200.05
  Bottom Layer w10: Y1.2 2778.59,1160 2783.14,1155.45 R17.1
SI_XTALO: C37.1 R17.2 U4.18 Y1.1 | length 444.2
  Top Layer w10: C37.1@2610.82,1200.05 2720.05,1200.05 2725,1205 U4.18 ; Y1.1@2694.85,1200.05 Y1.1@2697.35,1202.55
  Bottom Layer w10: R17.2 2693.14,1158.14 2699.85,1164.85 Y1.1
TUNE1: C40.1 C41.1 R18.1 U4.3 | length 2178.5
  Top Layer w10: C40.1 2840.73,1765.73 2825,1750 2825,1590 2835,1580 3020,1580 3040,1560 ; C41.1 3161.57,1626.57 3135,1600 3080,1600 3040,1560 ; v1(3180,550) 3180,285 3190,275 R18.1 ; v1(3180,690) 3180,710 3160,730 3160,1310 3040,1430 3040,1560
  Bottom Layer w10: v1(3180,550) v1(3180,690)
TUNE2: R18.3 U4.4 | length 1412.5
  Top Layer w10: U4.4 2800,1585 2823,1562 3008,1562 3022,1548 3022,1418 3140,1300 3140,650 3160,630 R18.3
USB_D+: R11.2 R14.2 U3.8 Z1.3 | length 885.9
  Top Layer w7: U3.8 1755,937.8 1750,932.8 1750,790 v1(1899.27,640.73) R11.2
  Bottom Layer w7: R14.2 1705.73,665.73 1720,680 ; 1710,670 1720,680 ; Z1.3 1887,582 1899.27,594.27 v1(1899.27,640.73) 1899.27,670.73 1890,680 1720,680
USB_D-: R12.2 U3.9 Z1.1 | length 556.1
  Top Layer w7: R12.2@1799.27,589.86 1799.27,719.52 1735,783.79 1735,942.48 1750,957.48 U3.9
  Bottom Layer w7: v1(1799.27,640) 1799.27,595.73 1813,582 Z1.1
VBUS: C9.2 C33.2 C34.1 L2.1 L3.2 U1.3 U3.12 Z1.5 | length 6749.7
  Top Layer w7: U3.12 1830,1016.53 1835,1021.53 v1(1835,1055) ; v1(1970,910) U1.3@2116.57,910
  Top Layer w15: v1(2030,440) 2080,440 2095,455 2095,710
  Top Layer w20: C9.2 3699.86,1601.01 L2.1
  Top Layer w30: 2350,820 2350,445 2305,400 2305,65 2322,48 3548,48 3600,100 3600,660 3630,690 3895,690 3920,715 3920,1910 3900,1930 3660,1930 3640,1910 3640,1830 3700,1770 3700,1710.87 C9.2
  Top Layer w40: C33.2@1990,600.6 1990,710 2180,710 ; U1.3 2117.13,822.13 2119.25,820 C34.1 ; L3.2@2180,600 2180,820
  Bottom Layer w7: v1(1835,1055) 1835,1045 v1(1970,910)
  Bottom Layer w15: Z1.5 1850,410 1860,400 1990,400 v1(2030,440)
VUSB: C35.1 J3.1 L3.1 | length 2076.3
  Top Layer w20: J3.1 1837.01,282.99 1854.18,265.82 ; 1865,43 1865,205 1850,220 1850,261.63 1854.18,265.82 ; 1865,45 1870,50 2155,50 ; 2165,43 L3.1@2165,465 ; 2165,430 2180,430 ; L3.1@2180,475 2180,43 1880,43 1880,210 1854.18,235.82 1854.18,265.82 ; 2180.14,350.14 C35.1
pads on no net: J1.3 J1.4 J1.5 J3.5 J3.MH1 J3.MH2 P1.0 P1.1 P4.0 P6.6 P6.8 P6.10 T1.4 T2.4 T3.4 U3.3 U3.4 U3.5 U3.6 U3.15 U3.16 U3.17 U3.18 U3.19 U3.20 U3.21 U3.22 U3.23 U3.24 U3.31 U3.32 U3.33 U3.34 U3.35 U3.36 U4.6 U4.7 Z1.4 Z1.6

## Polygon pours and split planes (outlines as drawn)
RFGND on Top Layer "Top Layer-No Net" (solid, remove dead copper, pour order 1000): 4000,0 0,0 0,3400 4000,3400 4000,0
RFGND on Bottom Layer "Top Layer-No Net" (solid, remove dead copper, pour order 1000): 4000,0 0,0 0,3400 4000,3400 4000,0

## Keep-outs
Keep-Out Layer:
  lines w10: 3790,20 3790,210 3980,210 3980,3190 3790,3190 3790,3380 210,3380 210,3190 20,3190 20,210 210,210 210,20 3855,20

## Other copper
Top Layer:
  rectangle net MVCC: 1975,970 2025,1125
  rectangle net MVCC: 1875,975 2250,1025
  rectangle net MVCC: 2200,880 2450,1250
  rectangle net MVCC: 1775,970 2415,1000
  rectangle net RFVCC: 2770,1410 2805,1470
Bottom Layer:
  rectangle net MVCC: 2200,880 2450,1250

## Silkscreen, mask and mechanical layers (free items; w line width, h text height)
Top Overlay:
  text "MW" at 2665,3120 h60
  text "SW" at 2185,3070 h60
  text "VCC" at 415,3035 h30 r90
  text "GND" at 515,3030 h30 r90
  text "CLK" at 615,3030 h30 r90
  text "SDI" at 715,3030 h30 r90
  text "DC" at 815,3030 h30 r90
  text "CS1" at 910,3030 h30 r90
  text "FS0" at 1010,3030 h30 r90
  text "FS2" at 1115,3030 h30 r90
  text "FM" at 3275,3010 h60
  text "TU" at 30,1280 h40
  text "ST" at 35,1080 h40
  text "JTAG" at 1140,900 h40
  text "OV" at 30,880 h40
  text "ER" at 35,675 h40
  text "TUNE" at 3780,655 h40
  text "R" at 60,480 h40
  text "VOL+" at 1030,30 h40
  text "VOL-" at 1390,30 h40
  text "BAND+" at 310,25 h40
  text "BAND-" at 670,25 h40
Top Solder:
  rectangle: 1400,1480 1600,3360
Mechanical 1:
  lines w10: 0,0 0,3400 4000,3400 4000,0 0,0

## Dimensions
4000,3400 to 4000,0 on Mechanical 13
4000,0 to 0,0 on Mechanical 13

## Text inside footprints (layer, text, board x,y; h text height)
J3: Mechanical 1 "PCB Edge" at 1741.09,22.98 h9.84
P2: Top Overlay "1" at 2628,2726 h50
P6: Top Overlay "1" at 1206,776 h40 r180; Top Overlay "2" at 1217,671 h40 r180